# Altium PCB Arduino.PcbDoc
Units mil, origin at the board's own origin, x right, y up, seen from the top; angles counter-clockwise.
Board outline 2750 x 2100 mil, 2 copper layers (Top Layer, Bottom Layer); 33 components, 43 nets, 171 pads, 15 vias.
Unrouted connection lines stored in the file: 49.
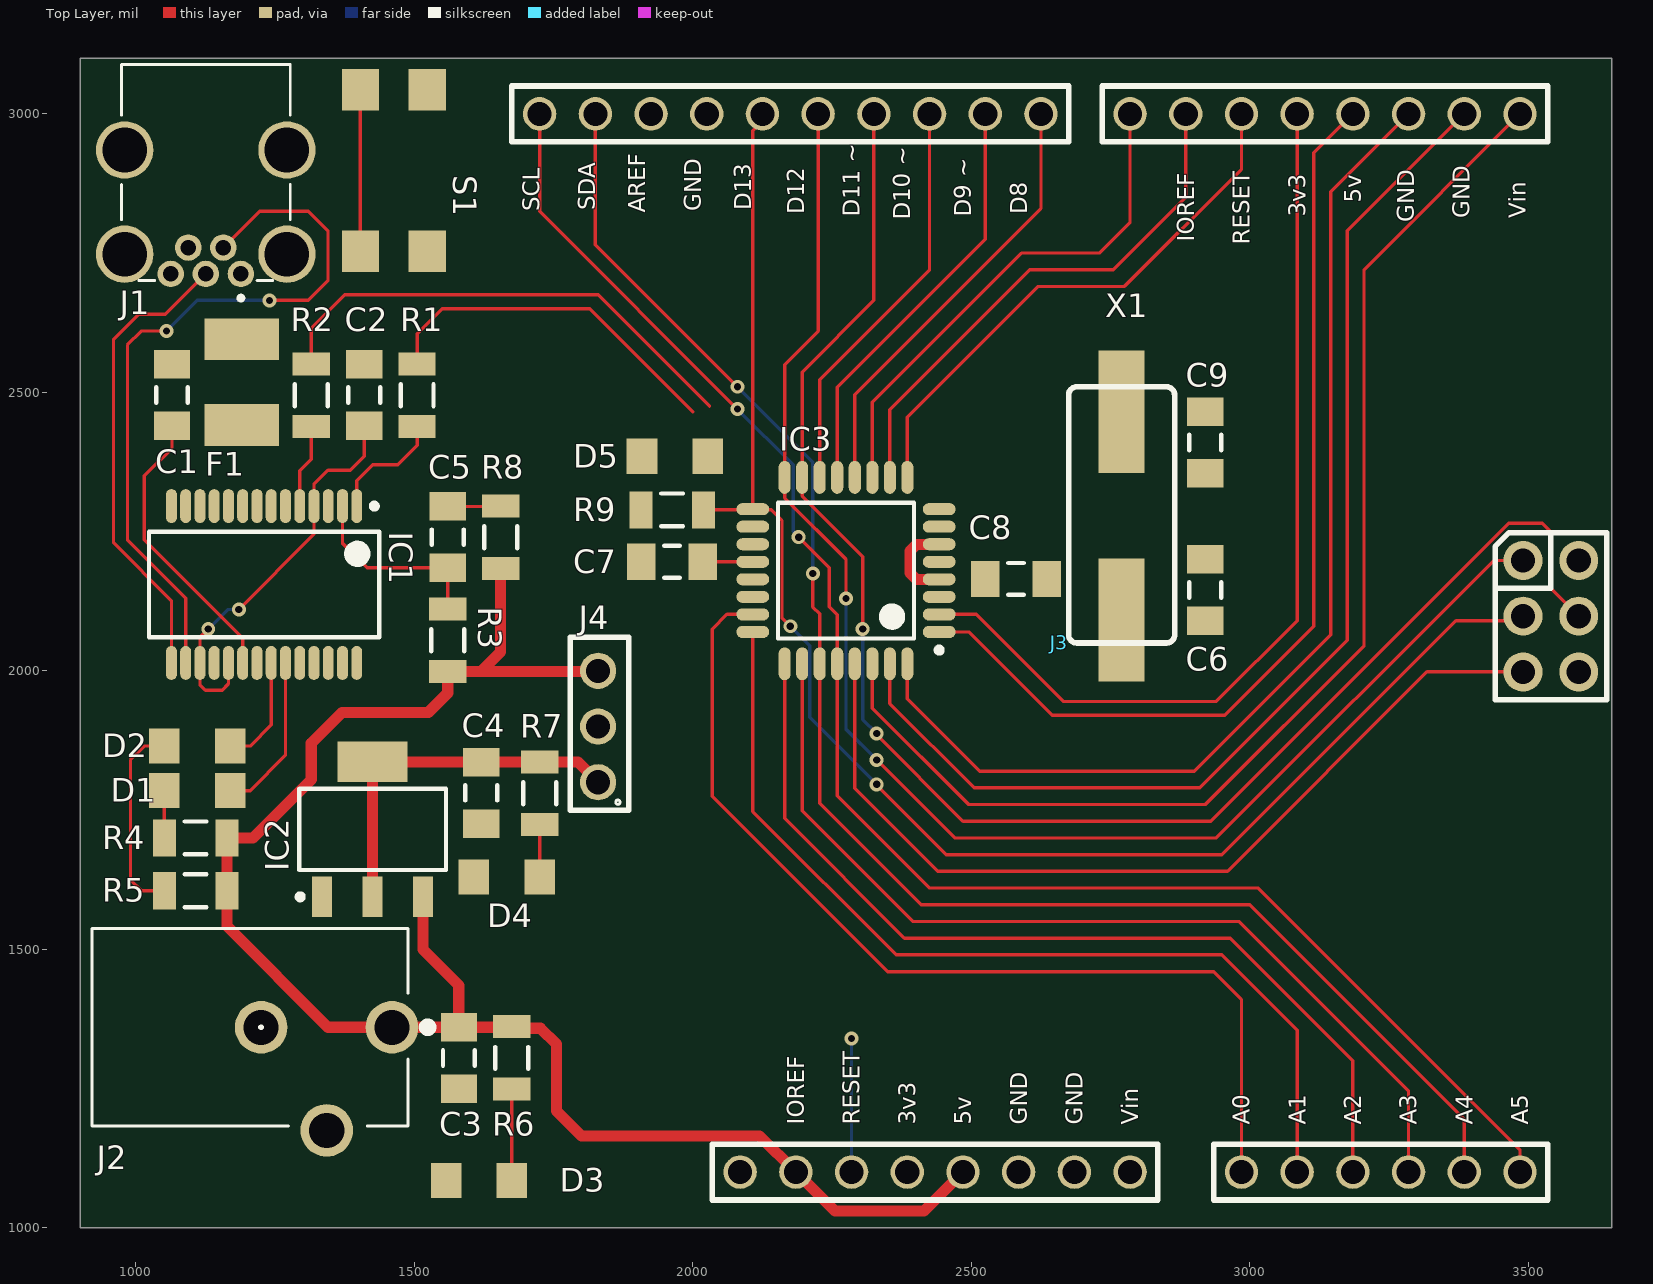
[diagram p0: Top Layer view]
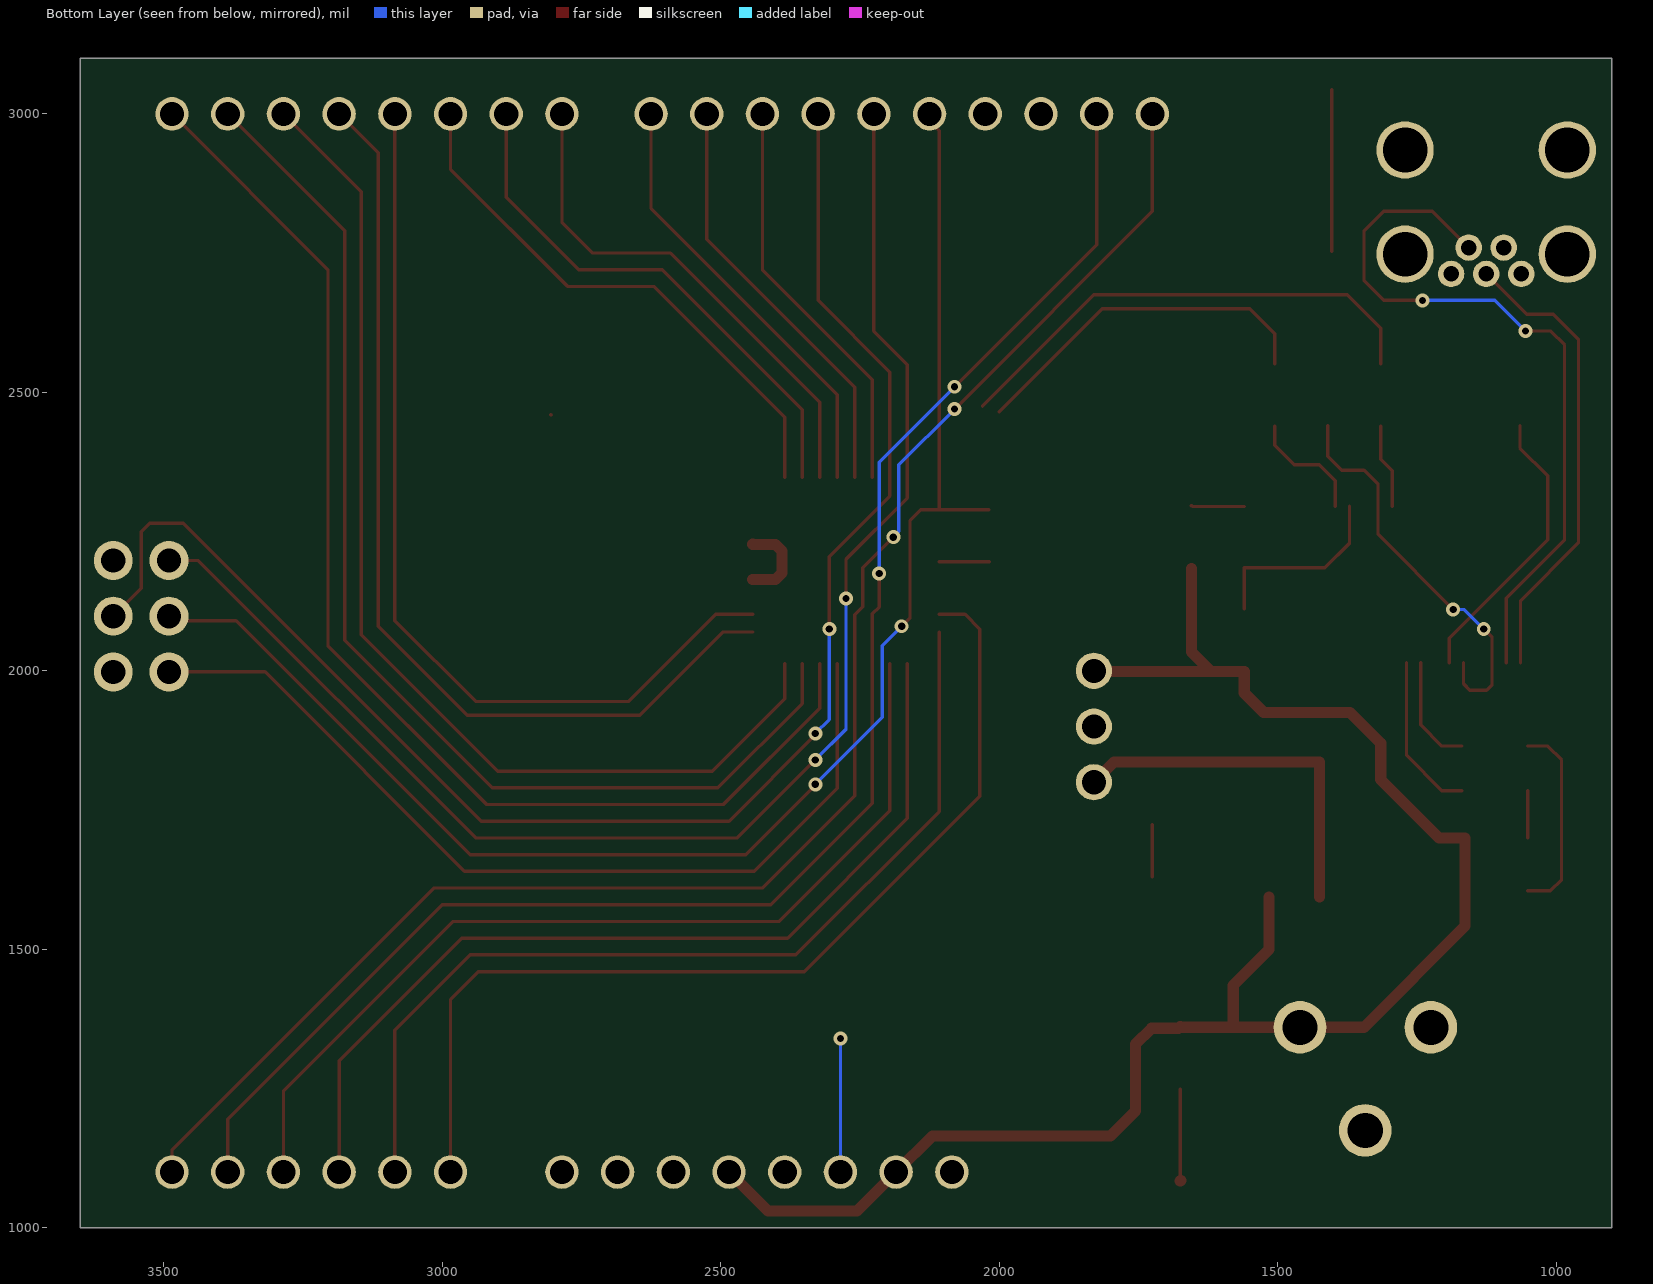
[diagram p1: Bottom Layer view, seen from below]

## Layer stack, top to bottom
Top Solder: solder mask 0.4, Solder Resist, Dk 3.5
Top Layer: signal copper 1.4
Dielectric 1: dielectric 12.6, FR-4, Dk 4.8
Bottom Layer: signal copper 1.4
Bottom Solder: solder mask 0.4, Solder Resist, Dk 3.5

## Board outline
900,1000 900,3100 3650,3100 3650,1000

## Design rules (kind name [scope] priority, off if disabled: settings)
Clearance [All] p1: gap=10 ignorepadtopadclearanceinfootprint=FALSE except(0: Arc-Hole Track-Hole SMDPad-Hole THPad-Hole Via-Hole Fill-Hole Poly-Hole Region-Hole Text-Hole)
MinimumSolderMaskSliver [All] p1: minsoldermaskwidth=2
PolygonConnect [All] p1: connectstyle=Relief reliefconductorwidth=10 reliefentries=4 polygonreliefangle="90 Angle" airgapwidth=10
RoutingVias [All] p1: holewidth=13 width=25 viastyle="Through Hole" minholewidth=13 minwidth=25 maxholewidth=28 maxwidth=50
SolderMaskExpansion [All] p1: expansion=4
Width [All] p1: maxlimit=20 minlimit=6 preferedwidth=10 minimp=50.000000 maximp=50.000000 favimp=50.000000
29 further rules are at their usual default settings.

## Components (designator, comment, footprint, x,y, rotation, side; value= is the part's Value field where it differs from the comment)
C1 "22uF" CAP1206 1065,2495 r270 top value="CAP CER 22UF 16V X5R 1206"
C2 "22uF" CAP1206 1410,2495 r270 top value="CAP CER 22UF 16V X5R 1206"
C3 "22uF" CAP1206 1580,1305 r270 top value="CAP CER 22UF 16V X5R 1206"
C4 "22uF" CAP1206 1620,1781 r90 top value="CAP CER 22UF 16V X5R 1206"
C5 "1uF" CAP1206 1560,2240 r90 top value="CAP CER 1UF 16V X7R 1206"
C6 "22pF" CAP1206 2920,2145 r270 top value="CAP CER 22PF 16V C0G/NP0 1206"
C7 "22uF" CAP1206 1962.68,2195.75 r0 top value="CAP CER 22UF 16V X5R 1206"
C8 "22uF" CAP1206 2580,2165 r180 top value="CAP CER 22UF 16V X5R 1206"
C9 "22pF" CAP1206 2920,2410 r90 top value="CAP CER 22PF 16V C0G/NP0 1206"
D1 "Red" LED 1110.31,1785 r270 top value="LED RED CLEAR 1206 SMD"
D2 "Red" LED 1110.31,1865 r270 top value="LED RED CLEAR 1206 SMD"
D3 "Red" LED 1616,1085 r90 top value="LED RED CLEAR 1206 SMD"
D4 "Red" LED 1666,1630 r90 top value="LED RED CLEAR 1206 SMD"
D5 "Red" LED 1967.68,2385.24 r270 top value="LED RED CLEAR 1206 SMD"
F1 "MF-MSMF050-2" FUSE 1200,2443.23 r90 top value="PTC RESET FUSE 15V 500MA 1812"
IC1 "FT232RL" SSOP-28 1230.31,2155 r270 top value="IC USB FS SERIAL UART 28-SSOP"
IC2 "AZ1117CH-3.3TRG1" SOT223 1425,1715.32 r90 top value="IC REG LINEAR 3.3V 800MA SOT223"
IC3 "ATMEGA328P-ANR" TQFP 2275,2180 r180 top locked value="IC MCU 8BIT 32KB FLASH 32TQFP"
J1 "XM7D-0512" XM7D-0512 1271.34,2940 r270 top value="CONN RCPT USB2.0 MINI B 5P R/A"
J2 "Power Jack" Power_Jack 1460,1360 r180 top value="CONN PWR JACK 2X5.5MM SOLDER"
J3 "Arduino_Shield" ARDUINO_SHIELD 2985,1100 r0 top locked
J4 "PREC003SAAN-RC" 3_PIN 1830,1800 r90 top value="CONN HEADER VERT 3POS 2.54MM"
R1 "1k" RES1206 1505,2495 r90 top value="RES 1K OHM 1% 1/2W 1206"
R2 "1k" RES1206 1315,2495 r90 top value="RES 1K OHM 1% 1/2W 1206"
R3 "1M" RES1206 1560,2055 r90 top value="RES 1M OHM 5% 1/4W 1206"
R4 "1k" RES1206 1107.31,1700 r0 top value="RES 1K OHM 1% 1/2W 1206"
R5 "1k" RES1206 1107.31,1605 r0 top value="RES 1K OHM 1% 1/2W 1206"
R6 "1k" RES1206 1675,1305 r90 top value="RES 1K OHM 1% 1/2W 1206"
R7 "1k" RES1206 1725,1780 r90 top value="RES 1K OHM 1% 1/2W 1206"
R8 "1M" RES1206 1655,2240 r270 top value="RES 1M OHM 5% 1/4W 1206"
R9 "1k" RES1206 1962.68,2288.91 r0 top value="RES 1K OHM 1% 1/2W 1206"
S1 "TL3305AF160QG" Switch 1465,2900 r0 top value="SWITCH TACTILE SPST-NO 50MA 12V"
X1 "16MHz" Crystal 2770,2465 r270 top value="CRYSTAL 16.0000MHZ 18PF SMD"

## Footprints (in the part's own frame and the unit in brackets; to place one, negate y for a bottom-side part, rotate by r counter-clockwise, add the part's x,y. Pads: shape width x height; smd on the part's side, far side on the other; paste and mask are expansions set on the pad)
3_PIN [mm]
  round 1.65 hole 1.1: 1(0,0) 2(2.54,0) 3(5.08,0)
  silkscreen extent -1.27,-1.4 6.6,1.27, body extent -1.28,-1.27 6.34,1.27, height 8.36
ARDUINO_SHIELD [mil]
  round 60 hole 43.31: A1(0,0) A2(100,0) A3(200,0) A4(300,0) A5(400,0) A6(500,0) B1(-200,0) B2(-300,0) B3(-400,0) B4(-500,0) B5(-600,0) B6(-700,0) B7(-800,0) B8(-900,0) C1(500,1900) C2(400,1900) C3(300,1900) C4(200,1900) C5(100,1900) C6(0,1900) C7(-100,1900) C8(-200,1900) D1(-360,1900) D2(-460,1900) D3(-560,1900) D4(-660,1900) D5(-760,1900) D6(-860,1900) D7(-960,1900) D8(-1060,1900) D9(-1160,1900) D10(-1260,1900)
  round 70 hole 43.31: E1(505.51,1098.03) E2(605.51,1098.03) E3(505.51,998.03) E4(605.51,998.03) E5(505.51,898.03) E6(605.51,898.03)
  silkscreen extent -1310,-50 656,1950, body extent -1319,-50 654,1951, height 336
CAP1206 [mm] "Chip Capacitor, 2-Leads, Body 3.20x1.50mm, IPC Medium Density"
  rect 1.3x1.65 smd: 1(-1.4,0) 2(1.4,0)
  silkscreen extent -0.35,-0.72 0.35,0.72, body extent -1.7,-0.8 1.7,0.8, height 0.56
Crystal [mm]
  rect 5.6x2.1 smd: 1(0,0) 2(9.5,0)
  silkscreen extent -1.14,-2.43 10.54,2.42, body extent -1.95,-2.43 11.35,2.42, height 4
FUSE [mm]
  rect 1.9x3.4 smd: 1(3.855,0.254) 2(-0.045,0.254)
  body extent -0.38,-1.37 4.17,1.87, height 0.68
LED [mil]
  rect 63x55 smd: 1(0,59) 2(0,-59)
  body extent -31,-63 31,63, height 44
Power_Jack [mm]
  round 2.4 hole 1.6: 1(0,0) 2(5.969,0) 3(2.977,4.7)
  silkscreen extent -1.82,-4.5 13.68,4.5, body extent -0.47,-4.49 14.15,5.28, height 10.68
RES1206 [mm] "Chip Resistor, 2-Leads, Body 3.10x1.60mm, IPC Medium Density"
  rect 1.05x1.7 smd: 1(-1.425,0) 2(1.425,0)
  silkscreen extent -0.5,-0.75 0.5,0.75, body extent -1.6,-0.85 1.6,0.85, height 0.65
SOT223 [mm] "SOT223, 4-Leads, Body 6.50x7.00mm (avg), Pitch 2.30mm, IPC Medium Density"
  rect 1.85x0.9 smd: 1(-3.075,2.3) 2(-3.075,0) 3(-3.075,-2.3)
  rect 1.85x3.2 smd: 4(3.075,0)
  silkscreen extent -3.2,-3.35 1.85,3.42, body extent -3.5,-3.35 3.5,3.35, height 1.8
SSOP-28 [mm] "SOP, 28-Leads, Body 10.28x5.30mm, Pitch 0.65mm, IPC Medium Density"
  oval 1.55x0.5 smd mask+0.051: 1(-3.575,4.225) 2(-3.575,3.575) 3(-3.575,2.925) 4(-3.575,2.275) 5(-3.575,1.625) 6(-3.575,0.975) 7(-3.575,0.325) 8(-3.575,-0.325) 9(-3.575,-0.975) 10(-3.575,-1.625) 11(-3.575,-2.275) 12(-3.575,-2.925) 13(-3.575,-3.575) 14(-3.575,-4.225) 15(3.575,-4.225) 16(3.575,-3.575) 17(3.575,-2.925) 18(3.575,-2.275) 19(3.575,-1.625) 20(3.575,-0.975) 21(3.575,-0.325) 22(3.575,0.325) 23(3.575,0.975) 24(3.575,1.625) 25(3.575,2.275) 26(3.575,2.925) 27(3.575,3.575) 28(3.575,4.225)
  silkscreen extent -3.7,-5.25 2.4,5.25, body extent -3.89,-5.25 3.89,5.25, height 2
Switch [mm]
  rect 1.7x1.9 smd: 1(1.479,-3.727) 2(1.479,3.639) 3(-1.569,-3.727) 4(-1.569,3.639)
  body extent -2.3,-3.75 2.2,3.75, height 3.8
TQFP [mm] "TQFP, 32-Leads, Body 7.00x7.00mm, Pitch 0.80mm, IPC Medium Density"
  oval 1.5x0.55 smd mask+0.102: 1(-4.25,2.8) 2(-4.25,2) 3(-4.25,1.2) 4(-4.25,0.4) 5(-4.25,-0.4) 6(-4.25,-1.2) 7(-4.25,-2) 8(-4.25,-2.8) 17(4.25,-2.8) 18(4.25,-2) 19(4.25,-1.2) 20(4.25,-0.4) 21(4.25,0.4) 22(4.25,1.2) 23(4.25,2) 24(4.25,2.8)
  oval 0.55x1.5 smd mask+0.102: 9(-2.8,-4.25) 10(-2,-4.25) 11(-1.2,-4.25) 12(-0.4,-4.25) 13(0.4,-4.25) 14(1.2,-4.25) 15(2,-4.25) 16(2.8,-4.25) 25(2.8,4.25) 26(2,4.25) 27(1.2,4.25) 28(0.4,4.25) 29(-0.4,4.25) 30(-1.2,4.25) 31(-2,4.25) 32(-2.8,4.25)
  silkscreen extent -4.38,-3.1 3.1,3.75, body extent -4.5,-4.5 4.5,4.5, height 1.2
XM7D-0512 [mm]
  round 1.208 hole 0.7: 1(5.777,-2.1) 2(4.577,-2.9) 3(5.777,-3.7) 4(4.577,-4.5) 5(5.777,-5.3)
  round 2.616 hole 2.032: SH1(0.127,-7.4) SH2(4.877,-7.4) SH3(4.877,0) SH4(0.127,0)
  silkscreen extent -3.77,-7.55 6.98,0.15, body extent -3.8,-7.75 6.05,0.35, height 3.95

## Part data
C1 C2 C3 C4 C7 C8: library part 1206_22uF, "22µF ±20% 16V Ceramic Capacitor X5R 1206 (3216 Metric)", Digikey Link=https://www.digikey.com/product-detail/en/CL31A226MOCLNNC/1276-2728-1-ND/3890814/?itemSeq=304982363, Digikey Part=1276-2728-1-ND
C5: library part 1206_1uF, "1µF ±20% 16V Ceramic Capacitor X7R 1206 (3216 Metric)", Digikey Link=https://www.digikey.com/product-detail/en/C1206C105M4RACTU/399-8150-1-ND/3471873/?itemSeq=304982366, Digikey Part=399-8150-1-ND
C6 C9: library part 1206_22pF, "22pF ±5% 16V Ceramic Capacitor C0G, NP0 1206 (3216 Metric)", Digikey Link=https://www.digikey.com/product-detail/en/885012008011/732-7867-1-ND/5454494/?itemSeq=304982362, Digikey Part=732-7867-1-ND
D1 D2 D3 D4 D5: library part 1206_RED_LED, "Red 638nm LED Indication - Discrete 1.8V 1206 (3216 Metric)", Digikey Link=https://www.digikey.com/product-detail/en/LTST-C150CKT/160-1167-1-ND/269239/?itemSeq=304982368, Digikey Part=160-1167-1-ND
F1: library part Fuse, "Polymeric PTC Resettable Fuse 15V 500mA Ih Surface Mount 1812 (4532 Metric), Concave", Digikey Link=https://www.digikey.com/product-detail/en/MF-MSMF050-2/MF-MSMF050-2CT-ND/662842/?itemSeq=304982360, Digikey Part=MF-MSMF050-2CT-ND
IC1: library part FTDI, "USB Bridge, USB to UART USB 2.0 UART Interface 28-SSOP", Digikey Link=https://www.digikey.com/product-detail/en/FT232RL-REEL/768-1007-1-ND/1836402/?itemSeq=304982359, Digikey Part=768-1007-1-ND
IC2: library part 3.3V_LDO, "Linear Voltage Regulator IC Positive Fixed 1 Output 1A SOT-223", Digikey Link=https://www.digikey.com/product-detail/en/AZ1117CH-3.3TRG1/AZ1117CH-3.3TRG1DICT-ND/4505206/?itemSeq=304982370, Digikey Part=AZ1117CH-3.3TRG1DICT-ND
IC3: library part ATMega328P, "AVR AVR® ATmega Microcontroller IC 8-Bit 20MHz 32KB (16K x 16) FLASH 32-TQFP (7x7)", Digikey Link=https://www.digikey.com/product-detail/en/ATMEGA328P-ANR/ATMEGA328P-ANRCT-ND/2774230/?itemSeq=304982365, Digikey Part=ATMEGA328P-ANRCT-ND
J1: library part USB, "USB - mini B USB 2.0 Receptacle Connector 5 Position Through Hole, Right Angle", Digikey Link=https://www.digikey.com/product-detail/en/XM7D-0512/OR1205-ND/4695531/?itemSeq=304982356, Digikey Part=OR1205-ND
J2: "Power Barrel Connector Jack 2.10mm ID (0.083\"), 5.50mm OD (0.217\") Through Hole, Right Angle", Digikey Link=https://www.digikey.com/product-detail/en/PJ-102A/CP-102A-ND/275425/?itemSeq=304982367, Digikey Part=CP-102A-ND
J4: library part 3_PIN, "Connector Header Through Hole 3 position 0.100\" (2.54mm)", Digikey Link=https://www.digikey.com/product-detail/en/PREC003SAAN-RC/S1012EC-03-ND/2774851/?itemSeq=304982371, Digikey Part=S1012EC-03-ND
R1 R2 R4 R5 R6 R7 R9: library part 1206_1K, "1 kOhms ±1% 0.5W, 1/2W Chip Resistor 1206 (3216 Metric) Anti-Sulfur, Moisture Resistant Thin Film", Digikey Link=https://www.digikey.com/product-detail/en/RNCP1206FTD1K00/RNCP1206FTD1K00CT-ND/2240675/?itemSeq=304982373, Digikey Part=RNCP1206FTD1K00CT-ND
R3 R8: library part 1206_1M, "1 MOhms ±5% 0.25W, 1/4W Chip Resistor 1206 (3216 Metric) Automotive AEC-Q200 Thick Film", Digikey Link=https://www.digikey.com/product-detail/en/RMCF1206JT1M00/RMCF1206JT1M00CT-ND/1942830/?itemSeq=304982358, Digikey Part="Number RMCF1206JT1M00CT-ND"
S1: library part Push_Button, "Tactile Switch SPST-NO Top Actuated Surface Mount", Digikey Link=https://www.digikey.com/product-detail/en/TL3305AF160QG/EG5350CT-ND/5816195/?itemSeq=304982361, Digikey Part=EG5350CT-ND
X1: library part 16MHz_Crystal, "16MHz ±30ppm Crystal 18pF 40 Ohms HC-49/US", Digikey Link=https://www.digikey.com/product-detail/en/ABLS-16.000MHZ-B4-T/535-10226-1-ND/2184261/?itemSeq=304982364, Digikey Part=535-10226-1-ND

## Via types
v1: diameter 25, hole 13, Top Layer to Bottom Layer, 15 vias

## Nets (pads, with @x,y where several pads share a name; then routed paths per layer and width w, separated by ;. In a path a pad name is that pad's centre, name@x,y a point inside that pad or via, vN(x,y) a via of type N, cw(c..) or ccw(c..) an arc to the next point about the centre after c; other vN are vias at no path point)
+3.3V: C4.2 IC2.2 IC2.4 J3.B5 J4.1 R7.2 | length 662.2
  Top Layer w20: IC2.2 IC2.4 1619.74,1836.38 C4.2 R7.2 1793.9,1836.1 J4.1
+5V: C3.1 IC2.3 J2.1 J3.B4 J3.B7 J3.E2 J4.3 R3.1 R4.2 R5.2 R6.2 R8.2 | length 3104.2
  Top Layer w20: IC2.3 1515.55,1499.45 1579.88,1435.12 C3.1@1579.88,1360 ; R8.2 1655,2033.9 1620,1998.9 ; J4.3 1828.9,1998.9 1620,1998.9 ; J3.B4 2415,1030 2255,1030 J3.B7 2120,1165 1800,1165 1755,1210 1755,1330 1726.75,1358.25 1677.85,1358.25 R6.2 1674.02,1360.12 C3.1 C3.1@1579.88,1360 ; C3.1@1579.88,1360 J2.1 1345,1360 1163.42,1541.58 R5.2 R4.2 1210,1700 1315,1805 1315,1870 1370,1925 1525,1925 1560,1960 R3.1 1620,1998.9
AD0: IC3.23 J3.A1 | length 1794.7
  Top Layer w6: IC3.23 2061.26,2101.26 2035,2075 2035,1775 2350,1460 2935,1460 2985,1410 J3.A1
AD1: IC3.24 J3.A2 | length 1717.3
  Top Layer w6: IC3.24 2107.68,1747.32 2365,1490 2950,1490 3085,1355 J3.A2
AD2: IC3.25 J3.A3 | length 1678
  Top Layer w6: IC3.25 2164.76,1735.24 2380,1520 2965,1520 3185,1300 J3.A3
AD3: IC3.26 J3.A4 | length 1706.3
  Top Layer w6: IC3.26 2196.26,1748.74 2395,1550 2980,1550 3285,1245 J3.A4
AREF: C7.2 IC3.20 J3.D8 | length 89.9
  Top Layer w6: C7.2 IC3.20
DTR: C5.1 IC1.2 R3.2 | length 347.8
  Top Layer w6: IC1.2 1371.06,2228.94 1415.12,2184.88 C5.1 R3.2
GND: C1.1 C2.1 C3.2 C4.1 C6.1 C7.1 C8.1 C9.1 D3.1 D4.1 D5.1 IC1.7 IC1.18 IC1.21 IC1.25 IC1.26 IC2.1 IC3.3 IC3.5 IC3.21 J1.5 J1.SH1 J1.SH2 J1.SH3 J1.SH4 J2.2 J3.B2 J3.B3 J3.D7 J3.E6 S1.1 S1.2
IO2: IC3.32 J3.C3 | length 1970.9
  Top Layer w6: IC3.32 2385.24,1949.76 2515,1820 2900,1820 3145,2065 3145,2860 J3.C3
IO3: IC3.1 J3.C4 | length 1750
  Top Layer w6: IC3.1 2495.24,2069.76 2645,1920 2955,1920 3115,2080 3115,2930 J3.C4
IO4: IC3.2 J3.C5 | length 1677.5
  Top Layer w6: IC3.2 2508.74,2101.26 2665,1945 2940,1945 3085,2090 J3.C5
IO5: IC3.9 J3.C6 | length 991.9
  Top Layer w6: IC3.9 2385.24,2455.24 2620,2690 2775,2690 2985,2900 J3.C6
IO6: IC3.10 J3.C7 | length 960.6
  Top Layer w6: IC3.10 2353.74,2468.74 2605,2720 2755,2720 2885,2850 J3.C7
IO7: IC3.11 J3.C8 | length 926.4
  Top Layer w6: IC3.11 2322.24,2482.24 2590,2750 2730,2750 2785,2805 J3.C8
IO8: IC3.12 J3.D1 | length 791.1
  Top Layer w6: IC3.12 2290.75,2495.75 2625,2830 J3.D1
IO9: IC3.13 J3.D2 | length 762.8
  Top Layer w6: IC3.13 2259.25,2509.25 2525,2775 J3.D2
MISO: IC3.16 J3.D5 J3.E1 | length 2678.2
  Top Layer w6: J3.D5 2225,2610 2164.76,2549.76 IC3.16 2164.76,2310.24 2275,2200 v1(2275,2130) ; v1(2330,1840) 2470,1700 2940,1700 3438.03,2198.03 J3.E1
  Bottom Layer w6: v1(2275,2130) 2275,1895 v1(2330,1840)
MOSI: IC3.15 J3.D4 J3.E4 | length 2898.6
  Top Layer w6: v1(2305,2075) 2305,2205 2196.26,2313.74 IC3.15 2196.26,2536.26 2325,2665 J3.D4 ; v1(2330,1887.5) 2330,1885 2485,1730 2930,1730 3465,2265 3525,2265 3540,2250 3540,2148.54 J3.E4
  Bottom Layer w6: v1(2305,2075) 2305,1912.5 v1(2330,1887.5)
NetC1_2: C1.2 F1.2 IC1.20 | length 519.6
  Top Layer w6: C1.2 1065,2400 1015,2350 1015,2235.31 1191.93,2058.39 IC1.20
NetC2_2: C2.2 IC1.4 IC1.17 IC1.19 | length 720.2
  Top Layer w6: v1(1130,2075) 1115.16,2060.16 IC1.17 1115.16,1974.84 1125,1965 1155,1965 1166.34,1976.34 IC1.19 ; v1(1185,2110) 1319.88,2244.88 IC1.4 1319.88,2334.88 1345,2360 1385,2360 1410,2385 C2.2
  Bottom Layer w6: v1(1130,2075) 1165,2110 v1(1185,2110)
NetC6_2: C6.2 IC3.7 X1.2
NetC9_2: C9.2 IC3.8 X1.1 | length 1
  Top Layer w6: X1.1@2804.28,2459.28 X1.1@2805,2460
NetD1_1: D1.1 IC1.23 | length 291.5
  Top Layer w6: D1.1 1205.31,1785 1268.7,1848.39 IC1.23
NetD1_2: D1.2 R4.1 | length 85
  Top Layer w6: R4.1 1051.21,1784.9 D1.2
NetD2_1: D2.1 IC1.22 | length 200.9
  Top Layer w6: D2.1 1205.31,1865 1243.11,1902.8 IC1.22
NetD2_2: D2.2 R5.1 | length 355.5
  Top Layer w6: R5.1 1010.31,1605 990.31,1625 990.31,1840 1015.31,1865 D2.2
NetD3_2: D3.2 R6.1 | length 165.7
  Top Layer w6: D3.2@1674,1085 1675,1086 R6.1
  Top Layer w20: D3.2@1674,1085 D3.2@1675,1084
NetD4_2: D4.2 R7.1 | length 93.9
  Top Layer w6: D4.2 R7.1
NetD5_2: D5.2 R9.1
NetF1_1: F1.1 J1.1
NetIC1_1: IC1.1 R1.1 | length 214.4
  Top Layer w6: IC1.1 1396.65,2341.65 1425,2370 1470,2370 1505,2405 R1.1
NetIC1_5: IC1.5 R2.1 | length 151.7
  Top Layer w6: IC1.5 1294.29,2359.29 1315,2380 R2.1
NetIC1_15: IC1.15 J1.3 | length 838.2
  Top Layer w6: IC1.15 1063.98,2126.02 960,2230 960,2595 1005,2640 1053.11,2640 J1.3
NetIC1_16: IC1.16 J1.2 | length 1341
  Top Layer w6: v1(1055,2610) 1010,2610 985,2585 985,2235 1089.57,2130.43 IC1.16 ; J1.2 1222.36,2825 1310,2825 1345,2790 1345,2700 1310,2665 v1(1240,2665)
  Bottom Layer w6: v1(1055,2610) 1110,2665 v1(1240,2665)
RESET: C5.2 IC3.29 J3.B6 J3.E5 R8.1 S1.3 S1.4 | length 2267.4
  Top Layer w6: S1.3 S1.4 ; C5.2 1652.74,2295.12 1654.36,2296.74 R8.1 ; J3.B6 J3.B6@2290.75,1105.75 ; IC3.29 2290.75,1789.25 2440,1640 2960,1640 3318.03,1998.03 J3.E5
  Bottom Layer w6: J3.B6 v1(2285,1340)
RX: IC3.30 J3.C1 R1.2 | length 2867.4
  Top Layer w6: R1.2 1505,2605 1550,2650 1815,2650 2000,2465 ; IC3.30 2322.24,1932.76 2495,1760 2920,1760 3205,2045 3205,2720 J3.C1
SCK: IC3.17 J3.D6 J3.E3 R9.2 | length 2802.9
  Top Layer w6: R9.2 IC3.17@2109,2288.91 ; J3.D6 2125,2986.81 2107.68,2969.49 IC3.17 IC3.17@2109,2288.91 ; v1(2175,2080) 2160,2095 2160,2270 2141.09,2288.91 IC3.17@2109,2288.91 ; v1(2330,1796.25) 2330,1795 2455,1670 2950,1670 3370.03,2090.03 3482.51,2090.03 J3.E3
  Bottom Layer w6: v1(2175,2080) 2210,2045 2210,1916.25 v1(2330,1796.25)
SCL: IC3.28 J3.A6 J3.D10 | length 2974.6
  Top Layer w6: J3.D10 1725,2825 v1(2080,2470) ; v1(2190,2240) 2245,2185 2245,2115 2259.25,2100.75 IC3.28 2259.25,1775.75 2425,1610 3015,1610 3485,1140 J3.A6
  Bottom Layer w6: v1(2080,2470) 2180,2370 2180,2250 v1(2190,2240)
SDA: IC3.27 J3.A5 J3.D9 | length 2891.8
  Top Layer w6: J3.D9 1825,2765 v1(2080,2510) ; v1(2215.5,2174.5) 2215.5,2114.5 2227.76,2102.24 IC3.27 2227.76,1762.24 2410,1580 3000,1580 3385,1195 J3.A5
  Bottom Layer w6: v1(2080,2510) 2215.5,2374.5 v1(2215.5,2174.5)
SS: IC3.14 J3.D3 | length 734.4
  Top Layer w6: IC3.14 2227.76,2522.76 2425,2720 J3.D3
TX: IC3.31 J3.C2 R2.2 | length 2983.7
  Top Layer w6: R2.2 1315,2615 1375,2675 1830,2675 2030,2475 ; IC3.31 2353.74,1941.26 2505,1790 2910,1790 3175,2055 3175,2790 J3.C2
Vcc: C8.2 IC3.4 IC3.6 IC3.18 J4.2 | length 153.6
  Top Layer w20: IC3.4 2401.72,2164.25 2390,2175.97 2390,2215 2401.93,2226.93 2442.01,2226.93 IC3.6
pads on no net: IC1.3 IC1.6 IC1.8 IC1.9 IC1.10 IC1.11 IC1.12 IC1.13 IC1.14 IC1.24 IC1.27 IC1.28 IC3.19 IC3.22 J1.4 J2.3 J3.B1 J3.B8

## Text inside footprints (layer, text, board x,y; h text height)
J3: Top Overlay "SCL" at 1725,2825 h30 r90; Top Overlay "SDA" at 1825,2827.07 h30 r90; Top Overlay "AREF" at 1915,2822.07 h30 r90; Top Overlay "GND" at 2015,2825 h30 r90; Top Overlay "D13" at 2105,2827.07 h30 r90; Top Overlay "D12" at 2200,2820 h30 r90; Top Overlay "D11 ~" at 2300,2815 h30 r90; Top Overlay "D10 ~" at 2390,2810 h30 r90; Top Overlay "D9 ~" at 2500,2815 h30 r90; Top Overlay "D8" at 2600,2820 h30 r90; Top Overlay "Vin" at 2800,1185 h30 r90; Top Overlay "GND" at 2700,1185 h30 r90; Top Overlay "GND" at 2600,1185 h30 r90; Top Overlay "5v" at 2500,1185 h30 r90; Top Overlay "3v3" at 2400,1185 h30 r90; Top Overlay "RESET" at 2300,1185 h30 r90; Top Overlay "IOREF" at 2200,1185 h30 r90; Top Overlay "IOREF" at 2900,2770 h30 r90; Top Overlay "RESET" at 3000,2765 h30 r90; Top Overlay "3v3" at 3100,2815 h30 r90; Top Overlay "5v" at 3200,2840 h30 r90; Top Overlay "GND" at 3295,2805 h30 r90; Top Overlay "GND" at 3395,2812.07 h30 r90; Top Overlay "Vin" at 3495,2812.07 h30 r90; Top Overlay "A1" at 3100,1185 h30 r90; Top Overlay "A0" at 3000,1185 h30 r90; Top Overlay "A2" at 3200,1185 h30 r90; Top Overlay "A3" at 3300,1185 h30 r90; Top Overlay "A4" at 3400,1185 h30 r90; Top Overlay "A5" at 3500,1185 h30 r90